# EAGLE board sp6641-aek (EAGLE 6.2)
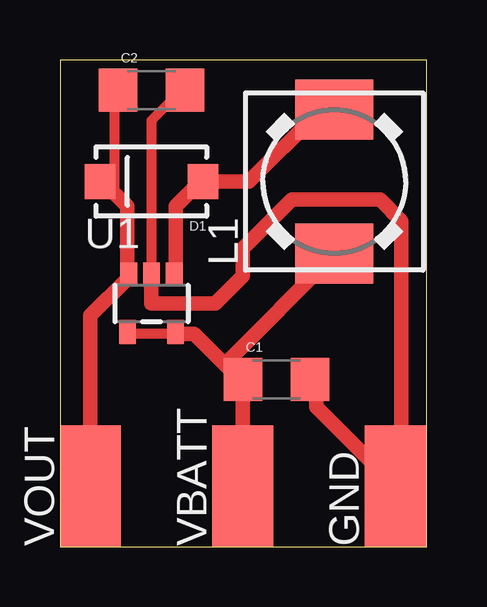
[diagram p0: board, top side]

Size 15.29 x 20.31 mm. Coordinates in mm from the lower left corner, seen from the top.
Outline: 0,0 15.29,0 15.29,20.31 0,20.31 0,0
Copper layers (1*16): Top 0.035mm / dielectric 1.5mm / Bottom 0.035mm
Design rules: minimum track width 10mil, minimum drill 24mil, track to track 8mil, track to pad 8mil, pad to pad 8mil, via to via 8mil, smd to smd 8mil, copper to edge 40mil, drill to drill 8mil, minimum pad ring 10mil, minimum via ring 8mil, stop-mask expansion 4mil, vias tented up to drill 0mil, thermal gap 10mil

## Footprints (pad centres in the part's own frame; a part is rotated, then mirrored left to right if it is on the bottom)
1206 = smd 1.6 x 1.8: 1 -1.4,0; 2 1.4,0
SMA-DIODE = smd 1.27 x 1.47: A -2.15,0; C 2.15,0
SMD2,54-5,08 = smd 2.54 x 5.08: 1 0,0
DR73 = smd 2.5 x 3.25: 1 -3,0; 2 3,0
SOT23-5 = smd 0.7 x 1: 1 0.95,1.2; 2 0,1.2; 3 -0.95,1.2; 4 -1,-1.2; 5 1,-1.2

## Placement (x,y rotation side)
C1  22uF  [1206]  9.02,6.99 0 top
C2  22uF  [1206]  3.81,19.05 0 top
D1  DIODE-SCHOTTKY_  [SMA-DIODE]  3.81,15.24 180 top
GND  [SMD2,54-5,08]  13.97,2.54 0 top
L1  22uH  [DR73]  11.43,15.24 90 top
U1  SP6641AEK  [SOT23-5]  3.81,10.16 0 top
VBATT  [SMD2,54-5,08]  7.62,2.54 0 top
VOUT  [SMD2,54-5,08]  1.27,2.54 0 top

## Library data of the parts
C1 C2 D1 = SparkFun
GND VBATT VOUT = wirepad
L1 = inductors
U1 = Sipex Custom

## Nets
GND: C1.2 C2.2 GND.1 U1.2
N$2: D1.A L1.2 U1.1
VBATT: C1.1 L1.1 U1.4 U1.5 VBATT.1
VOUT: C2.1 D1.C U1.3 VOUT.1

## Tracks (layer width: path | path; a pad name or v marks a point on that pad's centre or on a via)
GND
  Top 0.254: 5.08,19.05 C2.2 | 10.67,6.86 C1.2 | 3.81,10.92 U1.2 | 14.22,2.29 GND.1
  Top 0.406: U1.2 3.81,17.78 5.08,19.05
  Top 0.61: 10.67,6.86 10.67,5.84 GND.1 | 3.81,10.92 3.81,10.16 6.48,10.16 7.62,11.3 7.62,12.45 9.65,14.48 13.34,14.48 14.22,13.59 14.22,2.29
N$2
  Top 0.254: 4.83,11.43 U1.1 | 5.84,15.24 D1.A | 11.43,18.03 L1.2
  Top 0.61: 4.83,11.43 4.83,14.22 5.84,15.24 | D1.A 7.49,15.24 7.87,15.24 10.67,18.03 11.43,18.03
VBATT
  Top 0.254: 3.05,8.89 U1.4 | 4.57,8.89 U1.5 4.83,8.89 | 7.37,7.11 C1.1 | 11.43,12.19 L1.1 | 6.86,7.62 C1.1 | 7.62,6.86 C1.1
  Top 0.406: 4.57,8.89 3.05,8.89
  Top 0.61: 4.83,8.89 5.59,8.89 6.86,7.62 | 7.37,7.11 6.86,7.62 | 6.86,7.62 11.43,12.19 | 7.62,6.86 VBATT.1
VOUT
  Top 0.254: 2.79,11.43 U1.3 2.79,11.18 | 2.29,19.05 C2.1 | 1.78,15.24 2.29,14.73 D1.C 1.78,15.24
  Top 0.406: 2.29,14.73 2.29,19.05
  Top 0.61: 2.79,11.43 2.79,14.22 2.29,14.73 | 2.79,11.18 1.27,9.65 VOUT.1